# Altium PCB JHPowerSupplyPCBPart1.PcbDoc
Units mm, origin at the board's own origin, x right, y up, seen from the top; angles counter-clockwise.
Board outline 96.01 x 90 mm, 2 copper layers (Top Layer, Bottom Layer); 24 components, 16 nets, 168 pads, 79 vias.
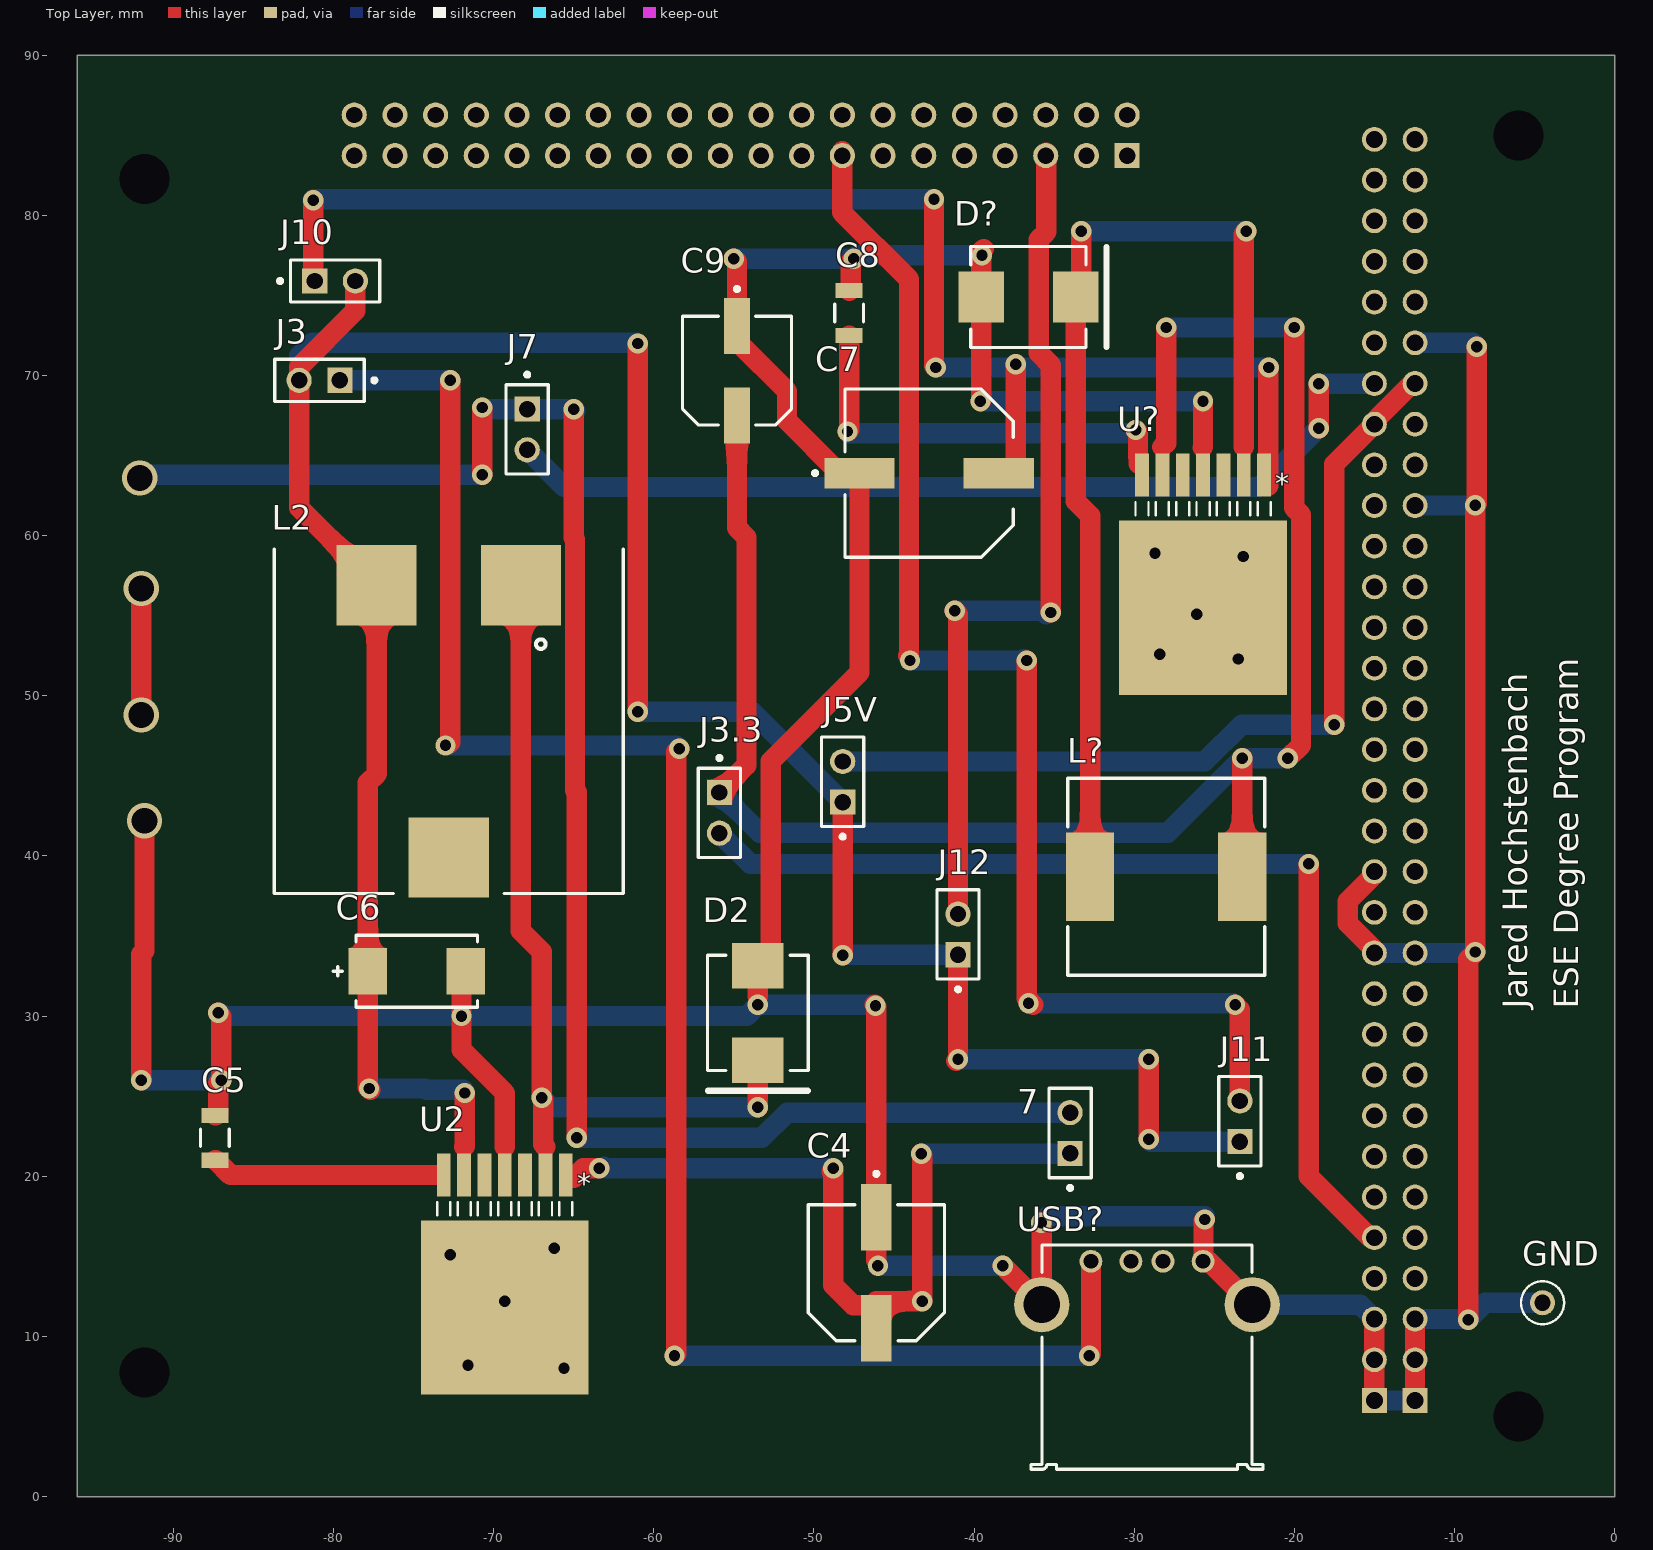
[diagram p0: Top Layer view]
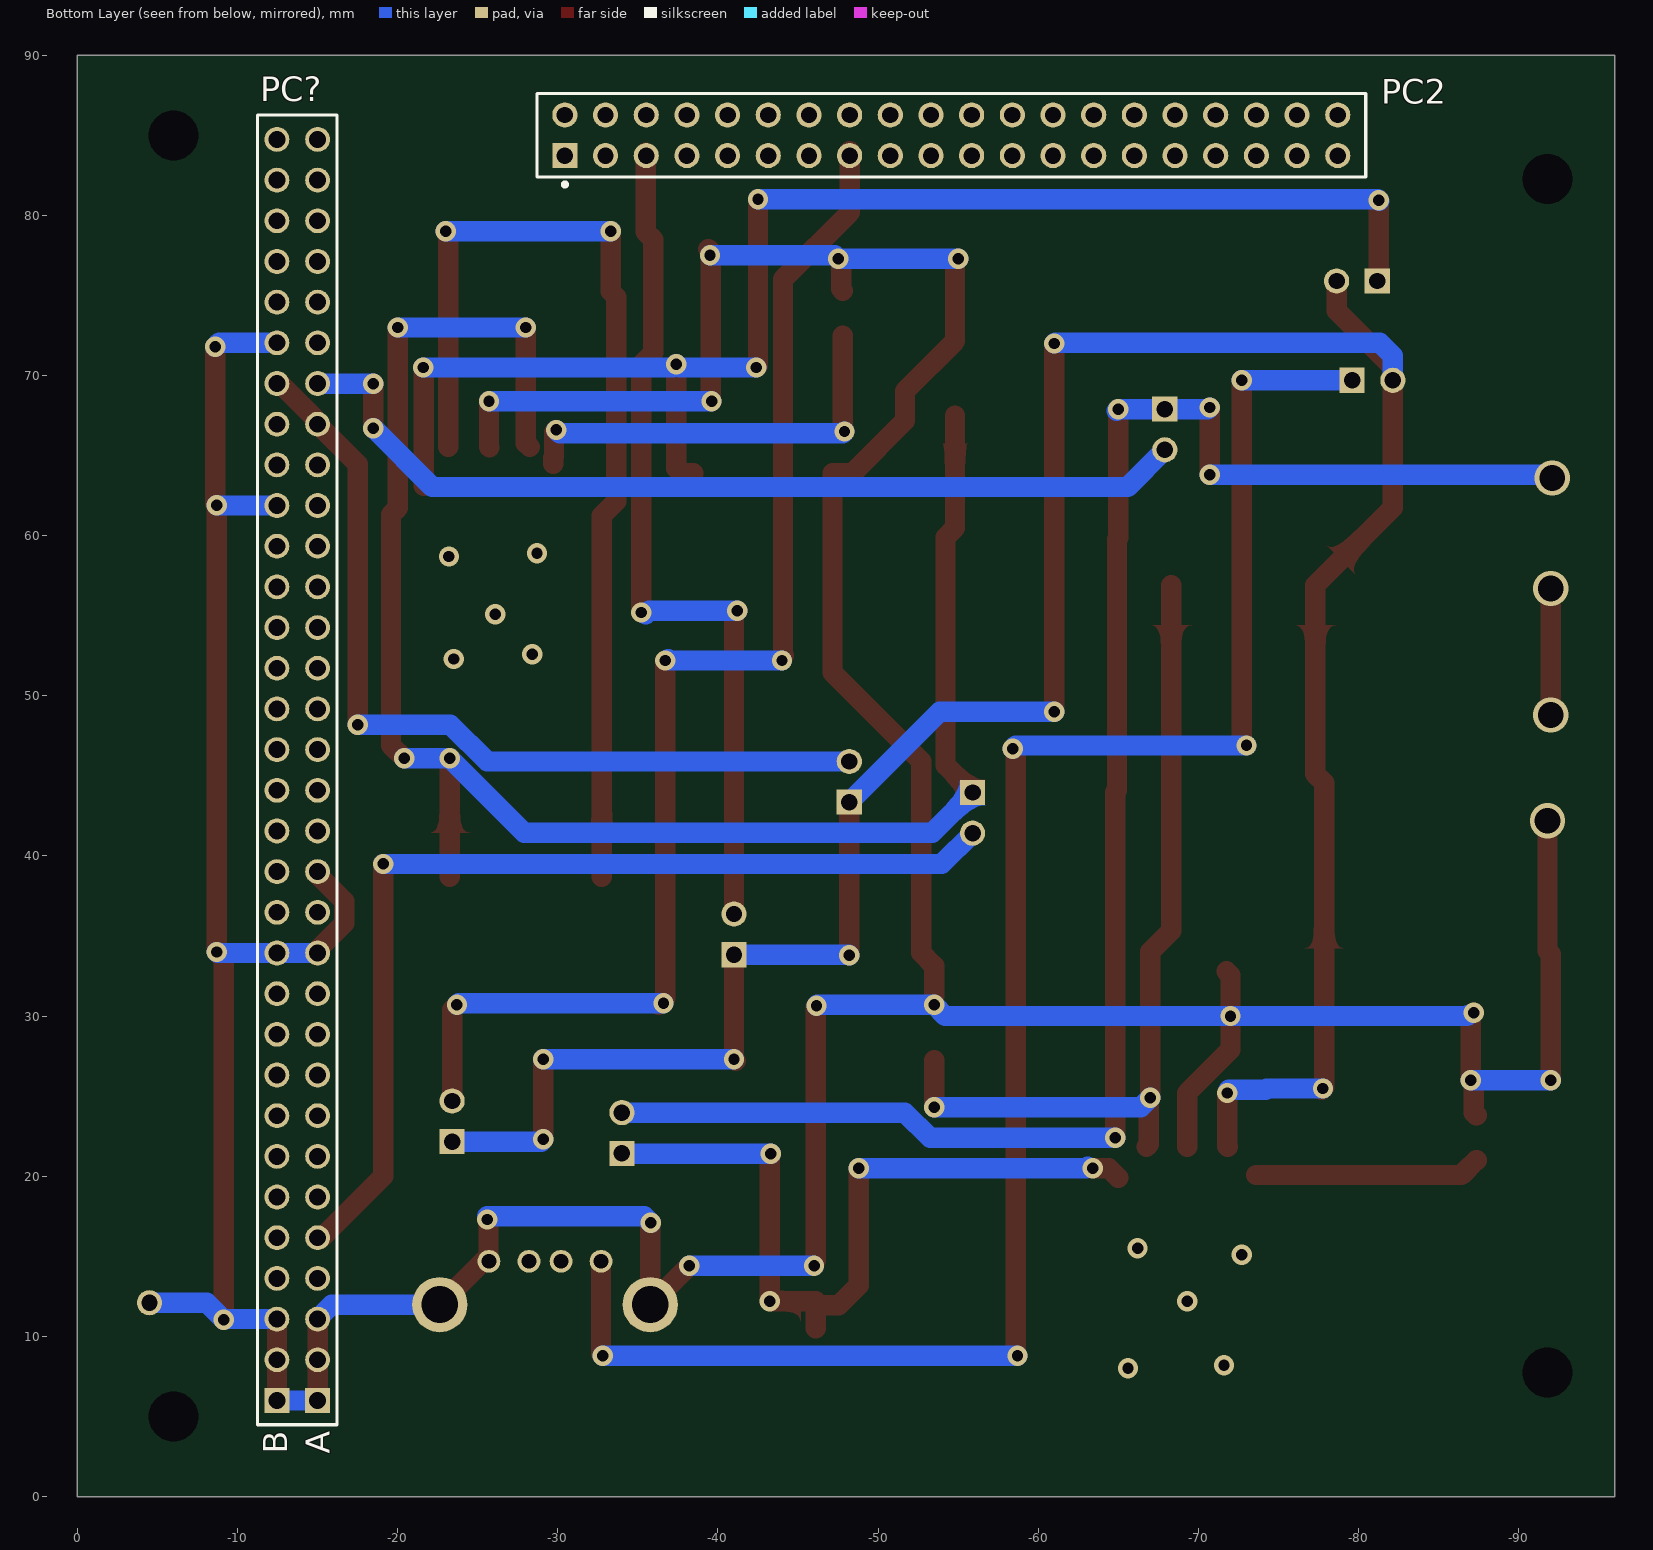
[diagram p1: Bottom Layer view, seen from below]
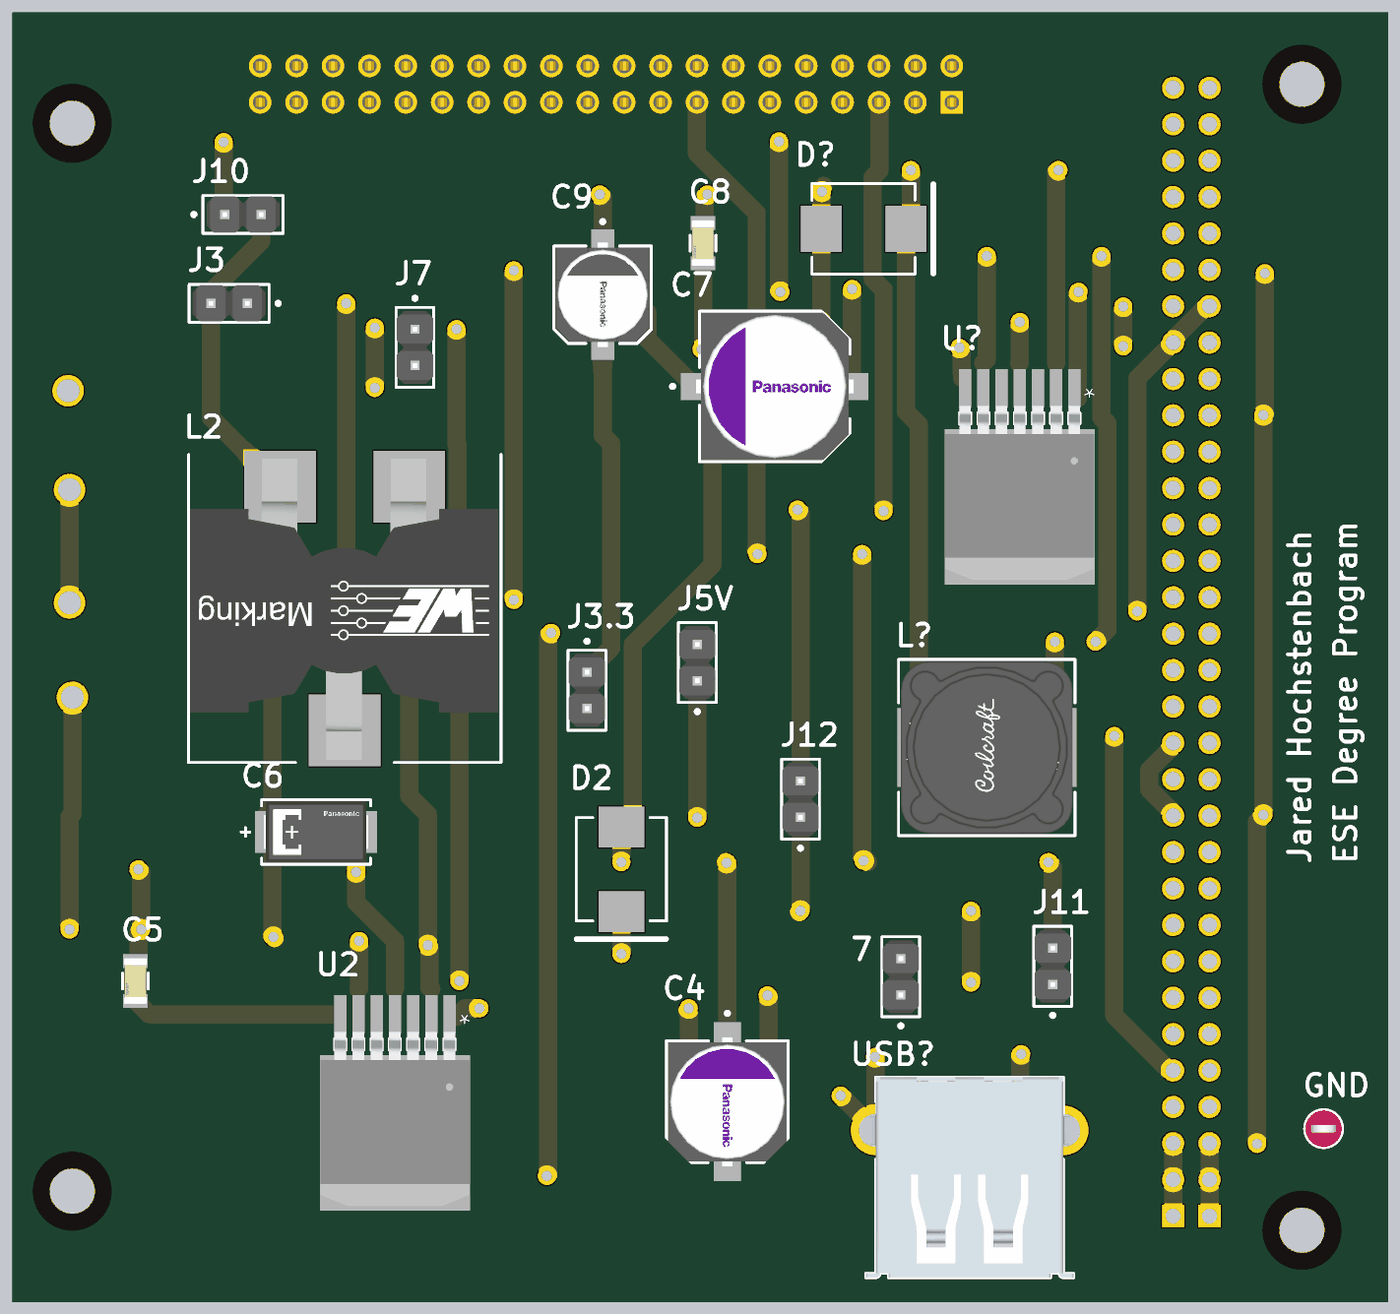
[diagram p2: 3D render of the assembled board from above, using the file's embedded part models]

## Layer stack, top to bottom
Top Solder: solder mask 0.0102, Solder Resist, Dk 3.5
Top Layer: signal copper 0.0356
Dielectric 1: dielectric 0.32, FR-4, Dk 4.8
Bottom Layer: signal copper 0.0356
Bottom Solder: solder mask 0.0102, Solder Resist, Dk 3.5

## Board outline
-96,0 0.012,0 0.012,90 -96,90

## Design rules (kind name [scope] priority, off if disabled: settings)
Clearance [All] p1: gap=0.254 ignorepadtopadclearanceinfootprint=FALSE except(0: Arc-Hole Track-Hole SMDPad-Hole THPad-Hole Via-Hole Fill-Hole Poly-Hole Region-Hole Text-Hole)
PolygonConnect [All] p1: connectstyle=Relief reliefconductorwidth=0.254 reliefentries=4 polygonreliefangle="90 Angle" airgapwidth=0.254
RoomDefinition JHPowerSupplySchematicpart1 [InComponentClass('JHPowerSupplySchematicpart1')] p1: confinementstyle=ConfineIn formatcopy=TRUE lockcomponents=FALSE outline -95.93,0 0.07,0 0.07,90.38 -95.93,90.38
RoutingVias [All] p1: holewidth=0.711 width=2 viastyle="Through Hole" minholewidth=0.711 minwidth=2 maxholewidth=0.711 maxwidth=2
SolderMaskExpansion [All] p1: expansion=0.102 istentingtop=FALSE
Width [All] p1: maxlimit=1.7 minlimit=1 preferedwidth=1.27 minimp=50.000000 maximp=50.000000 favimp=50.000000
30 further rules are at their usual default settings.

## Components (designator, comment, footprint, x,y, rotation, side; value= is the part's Value field where it differs from the comment)
7 "M20-9990246" FP-M20-9990246-MFG -34,22.7 r90 top
C4 "50SVPF18M" FP-OS-CON-SMT-E7-MFG -46.1,13.975 r270 top
C5 "C1206C821K5GACTU" FP-C1206C-EB-MFG -87.4,22.4 r90 top value="820 pF"
C6 "10TPE220MIL" FP-POSCAP-D3L-MFG -74.8,32.8 r180 top
C7 "50SVPF68M" FP-OS-CON-SMT-F12-MFG -42.8,63.9 r0 top
C8 "C1206C821K5GACTU" FP-C1206C-EB-MFG -47.8,73.9 r90 top value="820 pF"
C9 "6SVPC330M" FP-OS-CON-SMT-C6-MFG -54.8,70.3 r270 top
D2 "B560C-13-F" DIOD-B5X0C-2_M -53.5,30.2 r90 top
D? "B560C-13-F" DIOD-B5X0C-2_M -36.6,74.9 r180 top
GND "5000" FP-5000-MFG -4.5,12.1 r0 top
J3 "M20-9990246" FP-M20-9990246-MFG -80.87,69.7 r180 top
J3.3 "M20-9990246" FP-M20-9990246-MFG -55.9,42.69 r270 top
J5V "M20-9990246" FP-M20-9990246-MFG -48.2,44.63 r90 top
J7 "M20-9990246" FP-M20-9990246-MFG -67.9,66.63 r270 top
J10 "M20-9990246" FP-M20-9990246-MFG -79.9,75.9 r0 top
J11 "M20-9990246" FP-M20-9990246-MFG -23.4,23.43 r90 top
J12 "M20-9990246" FP-M20-9990246-MFG -41,35.1 r90 top
L2 "7443631000" WE-HCF-2013 -72.8,48.4 r270 top
L? "MSS1210-333MEB" FP-MSS1210-333MEB-MFG -28,38.7 r0 top
PC2 "M20-6102045" FP-M20-6102045-MFG -54.57,85 r180 bottom
PC? "PC104-CN-2P-F-R64" BTB2-54-V64F-04 -15,6 r90 bottom
U2 "LM2599SX-5.0/NOPB" TS7B -69.3,11.8 r180 top
U? "LM2599SX-3.3/NOPB" TS7B -25.7,55.5 r180 top
USB? "61400416021" 61400416021 -29.2,8.7 r0 top

## Footprints (in the part's own frame and the unit in brackets; to place one, negate y for a bottom-side part, rotate by r counter-clockwise, add the part's x,y. Pads: shape width x height; smd on the part's side, far side on the other; paste and mask are expansions set on the pad)
61400416021 [mm] "USB 2.0 Type A Horizontal"
  round 1.42 hole 0.92: 1(-3.5,5.99) 2(-1,5.99) 3(1,5.99) 4(3.5,5.99)
  round 3.45 hole 2.3: Shell(-6.57,3.28) Shell(6.57,3.28)
  silkscreen extent -7.25,-7 7.25,7, body extent -8,-7 8,7, height 7.63
BTB2-54-V64F-04 [mm] "Board-to-Board Connector, PC104 BA ISA, Stackthrough, Vertical, 2-Row, 64-Postion, Pitch 2.54mm,  Receptacle , Height 11.05mm"
  rect 1.55x1.55 hole 1.05: A1(0,0) B1(0,2.54)
  round 1.55 hole 1.05: A2(2.54,0) A3(5.08,0) A4(7.62,0) A5(10.16,0) A6(12.7,0) A7(15.24,0) A8(17.78,0) A9(20.32,0) A10(22.86,0) A11(25.4,0) A12(27.94,0) A13(30.48,0) A14(33.02,0) A15(35.56,0) A16(38.1,0) A17(40.64,0) A18(43.18,0) A19(45.72,0) A20(48.26,0) A21(50.8,0) A22(53.34,0) A23(55.88,0) A24(58.42,0) A25(60.96,0) A26(63.5,0) A27(66.04,0) A28(68.58,0) A29(71.12,0) A30(73.66,0) A31(76.2,0) A32(78.74,0) B2(2.54,2.54) B3(5.08,2.54) B4(7.62,2.54) B5(10.16,2.54) B6(12.7,2.54) B7(15.24,2.54) B8(17.78,2.54) B9(20.32,2.54) B10(22.86,2.54) B11(25.4,2.54) B12(27.94,2.54) B13(30.48,2.54) B14(33.02,2.54) B15(35.56,2.54) B16(38.1,2.54) B17(40.64,2.54) B18(43.18,2.54) B19(45.72,2.54) B20(48.26,2.54) B21(50.8,2.54) B22(53.34,2.54) B23(55.88,2.54) B24(58.42,2.54) B25(60.96,2.54) B26(63.5,2.54) B27(66.04,2.54) B28(68.58,2.54) B29(71.12,2.54) B30(73.66,2.54) B31(76.2,2.54) B32(78.74,2.54)
  silkscreen extent -1.52,-1.2 80.27,3.75, body extent -1.6,-1.2 80.34,3.75, height 11.05
DIOD-B5X0C-2_M [mm] "Molded Diode, 2-Leads, Body 7.11x6.22mm, IPC Low Density"
  rect 2.85x3.2 smd: 1(-2.95,0) 2(2.95,0)
  silkscreen extent -4.87,-3.15 3.6,3.15, body extent -3.56,-3.11 3.55,3.11, height 2.63
FP-5000-MFG [mm]
  round 1.57 hole 1.02 paste-1000 mask+0: 1(0,0)
  silkscreen extent -1.35,-1.34 1.35,1.34, body extent -1.45,-1.45 1.45,1.45, height 0.25
FP-C1206C-EB-MFG [mm]
  rect 0.95x1.7 smd paste+0 mask+0: 1(-1.4,0) 2(1.4,0)
  silkscreen extent -0.55,-0.9 0.55,0.9, body extent -2,-1 2,1, height 0.25
FP-M20-6102045-MFG [mm]
  rect 1.57x1.57 hole 1.02 paste-1000 mask+0: 1(-24.13,-1.27)
  round 1.57 hole 1.02 paste-1000 mask+0: 2(-24.13,1.27) 3(-21.59,-1.27) 4(-21.59,1.27) 5(-19.05,-1.27) 6(-19.05,1.27) 7(-16.51,-1.27) 8(-16.51,1.27) 9(-13.97,-1.27) 10(-13.97,1.27) 11(-11.43,-1.27) 12(-11.43,1.27) 13(-8.89,-1.27) 14(-8.89,1.27) 15(-6.35,-1.27) 16(-6.35,1.27) 17(-3.81,-1.27) 18(-3.81,1.27) 19(-1.27,-1.27) 20(-1.27,1.27) 21(1.27,-1.27) 22(1.27,1.27) 23(3.81,-1.27) 24(3.81,1.27) 25(6.35,-1.27) 26(6.35,1.27) 27(8.89,-1.27) 28(8.89,1.27) 29(11.43,-1.27) 30(11.43,1.27) 31(13.97,-1.27) 32(13.97,1.27) 33(16.51,-1.27) 34(16.51,1.27) 35(19.05,-1.27) 36(19.05,1.27) 37(21.59,-1.27) 38(21.59,1.27) 39(24.13,-1.27) 40(24.13,1.27)
  silkscreen extent -25.88,-3.19 25.88,2.6, body extent -25.73,-2.5 25.73,2.5, height 11.25
FP-M20-9990246-MFG [mm]
  rect 1.57x1.57 hole 1.02 paste-1000 mask+0: 1(-1.27,0)
  round 1.57 hole 1.02 paste-1000 mask+0: 2(1.27,0)
  silkscreen extent -3.55,-1.32 2.79,1.32, body extent -2.89,-1.42 2.89,1.42, height 0.25
FP-MSS1210-333MEB-MFG [mm]
  rect 3x5.5 smd paste+0 mask+0: 1(-4.75,0) 2(4.75,0)
  silkscreen extent -6.15,-6.15 6.15,6.15, body extent -6.35,-6.25 6.35,6.25, height 0.25
FP-OS-CON-SMT-C6-MFG [mm]
  rect 3.5x1.6 smd paste+0 mask+0: 1(-2.8,0) 2(2.8,0)
  silkscreen extent -5.22,-3.4 3.4,3.4, body extent -4.8,-3.65 4.8,3.65, height 0.25
FP-OS-CON-SMT-E7-MFG [mm]
  rect 4.15x1.9 smd paste+0 mask+0: 1(-3.475,0) 2(3.475,0)
  silkscreen extent -6.3,-4.25 4.25,4.25, body extent -5.8,-4.5 5.8,4.5, height 0.25
FP-OS-CON-SMT-F12-MFG [mm]
  rect 4.4x1.9 smd paste+0 mask+0: 1(-4.35,0) 2(4.35,0)
  silkscreen extent -7.25,-5.25 5.25,5.25, body extent -6.8,-5.5 6.8,5.5, height 0.25
FP-POSCAP-D3L-MFG [mm]
  rect 2.4x2.9 smd paste+0 mask+0: 1(-3.05,0) 2(3.05,0)
  silkscreen extent -3.8,-2.25 5.23,2.25, body extent -4.35,-2.35 4.35,2.35, height 0.25
TS7B [mil]
  rect 33.97x105.56 smd paste+0 mask+0: 1(-150,-326) 2(-100,-326) 3(-50,-326) 4(0,-326) 5(50,-326) 6(100,-326) 7(150,-326)
  rect 412x428 smd paste+0 mask+0: 8(0,0)
  silkscreen extent -166,-259 166,-227, body extent -205,-278 205,200, height 189
WE-HCF-2013 [mm] "SMD Inductor, 3-Leads, Body 21.5 x 21.0 mm"
  rect 5x5 smd: 1(-8.5,4.5) 2(-8.5,-4.5) 3(8.5,0)
  silkscreen extent -10.75,-10.9 10.75,10.9, body extent -10.45,-10.8 10.55,10.7, height 13.98

## Part data
7 J3 J3.3 J5V J7 J10 J11 J12: library part CMP-15831-000009-1, "CONN HEADER VERT 2POS 2.54MM", Current Rating=3A, Manufacturer=Harwin, Temperature="-40°C to +105°C", Temperature Range High=+105°C, Temperature Range Low=-40°C, Automotive=No, Category=Conn, ComponentLink2Description=Datasheet, ComponentLink2URL=https://cdn.harwin.com/pdfs/M20-999.pdf, Conn Gender=Male, Conn Orientation=Vertical, Contact Material=Tin,Nickel, Device Class L1=Connectors, Device Class L2="Headers and Wire Housings", Device Class L3=unset, Digikey Description="CONN HEADER VERT 2POS 2.54MM", Height=8.99mm, Lead Free=Yes, Manufacturer Part Number=M20-9990246, Mouser Description="2.54mm (0.1\") Pitch SIL Vertical PC Tail Pin Header, 6.1mm mating pin height, tin, 2 contacts", Number of Contacts=2, Number of Rows=1, Octopart=https://octopart.com/m20-9990246-harwin-2590635, Package=M20-9990246, Pitch=2.54mm, RoHS=TRUE
C4: library part CMP-05428-000339-1, "Conductive Polymer Aluminum Solid Capacitors (OS-CON) 18uF ±20% 50V RADIAL SMT 8x6.9mm", Capacitance=18uF, Case/Package=Radial, ESR (Equivalent Series Resistance)=35mR, Leakage Current=180uA, Max Operating Temperature=105°C, Min Operating Temperature=-55°C, Package Quantity=1000, Ripple Current=2.7A, Tolerance=20%, Voltage=50V, Diameter=8mm, Dissipation Factor=12%, Height=6.9mm, Height - Seated (Max)=0.276inch, Length=6.9mm, Life (Hours)=5000Hour, Mount="Surface Mount", Number of Pins=7, Packaging="Cut Tape", Polarity=Polar, REACH SVHC="No SVHC", Ripple Current (AC)=2.7A, RoHS Compliant=Yes, Series="OS-CON™, SVPF", Termination=SMD/SMT, Voltage Rating=50V, Voltage Rating (DC)=50V, Weight=0.021164oz
C5 C8: library part CMP-03020-020553-1, "CAP CER 820PF 50V C0G/NP0 1206", Capacitance="820 pF", Manufacturer=KEMET, Package=C1206C-EB, Temperature="-55°C to +150°C", Temperature Characteristic=C0G, Temperature Coefficient=15%, Temperature Range High=+150°C, Temperature Range Low=-55°C, Tolerance=0.1, Voltage Rating="50 V", Automotive=Yes, Automotive Grade="Grade 0", Category=Cap, ComponentLink2Description=Datasheet, ComponentLink2URL=https://content.kemet.com/datasheets/KEM_C1007_X8R_ULTRA_150C_SMD.pdf, Device Class L1="Passive Components", Device Class L2=Capacitors, Device Class L3="Ceramic Capacitors", Digikey Description="CAP CER 820PF 50V C0G/NP0 1206", Height=0.88mm, Ipc Land Pattern Name=CAPC320160X78, Lead Free=Yes, Manufacturer Part Number=C1206C821K5GACTU, Material=Ceramic, Mouser Description="Multilayer Ceramic Capacitors MLCC - SMD/SMT 50volts 820pF C0G 10%", Octopart=https://octopart.com/c1206c821k5gactu-kemet-125661, RoHS=TRUE
C6: library part CMP-05428-000285-1, "Molded Tantalum Polymer Capacitor 220uF 20% 10V life 2000Hours SMD 2917", Capacitance=220uF, Case Code (Imperial)=2917, Case Code (Metric)=7343, ESR (Equivalent Series Resistance)=18mR, Leakage Current=220uA, Max Operating Temperature=105°C, Min Operating Temperature=-55°C, Package Quantity=2500, Ripple Current=2.8A, Tolerance=20%, Voltage=10V, Case/Package=2917, Construction=Flat, Depth=4.3mm, Dissipation Factor=10%, Features="General Purpose", Height=2.8mm, Height - Seated (Max)=0.118inch, Lead Free="Lead Free", Length=7.3mm, Mount="Surface Mount", Packaging="Tape and Reel", Polarity=Polar, Radiation Hardening=No, REACH SVHC="No SVHC", RoHS Compliant=Yes, Series="POSCAP™ TPE", Termination=SMD/SMT, Voltage Rating=10V, Voltage Rating (DC)=10V, Width=0.169inch
C7: library part CMP-05428-000631-1, "Conductive Polymer Aluminum Solid Capacitors (OS-CON) 68uF ±20% 50V RADIAL SMT 10x12.6mm", Capacitance=68uF, Case/Package=Radial, ESR (Equivalent Series Resistance)=20mR, Leakage Current=680uA, Max Operating Temperature=105°C, Min Operating Temperature=-55°C, Package Quantity=400, Ripple Current=4.3A, Tolerance=20%, Voltage=50V, Construction=Cylindrical, Diameter=10mm, Dissipation Factor=12%, Height=12.6mm, Height - Seated (Max)=0.5inch, Lead Free="Lead Free", Length=12.6mm, Life (Hours)=5000Hour, Mount="Surface Mount", Number of Pins=12, Packaging="Tape and Reel", Polarity=Polar, REACH SVHC="No SVHC", Ripple Current (AC)=4.3A, RoHS Compliant=Yes, Series="OS-CON™, SVPF", Termination=SMD/SMT, Voltage Rating=50V, Voltage Rating (DC)=50V
C9: library part CMP-05428-000913-1, "Conductive Polymer Aluminum Solid Capacitors (OS-CON) 330uF ±20% 6.3V", Capacitance=330uF, Case/Package=Radial, ESR (Equivalent Series Resistance)=17mR, Leakage Current=415uA, Max Operating Temperature=105°C, Min Operating Temperature=-55°C, Package Quantity=1000, Ripple Current=3.39A, Tolerance=20%, Voltage=6.3V, Construction=Cylindrical, Diameter=6.3mm, Dissipation Factor=12%, Height=5.9mm, Height - Seated (Max)=0.236inch, Lead Free="Lead Free", Length=5.9mm, Life (Hours)=2000Hour, Mount="Surface Mount", Number of Pins=6, Packaging="Tape and Reel", Polarity=Polar, Radiation Hardening=No, REACH SVHC="No SVHC", Ripple Current (AC)=3.39A, RoHS Compliant=Yes, Series="OS-CON™, SVPC", Termination=SMD/SMT, Voltage Rating=6.3V, Voltage Rating (DC)=6.3V
D2 D?: library part CMP-2000-05098-2, "Schottky Barrier Rectifier, 5 A, 60 V, -55 to 125 degC, 2-Pin SMD, RoHS, Tape and Reel", If - Forward Current=5A, Ifsm - Forward Surge Current=100A, Ir - Reverse Current=500uA, Manufacturer=DiodesIncorporated, Maximum Operating Temperature=+125C, Minimum Operating Temperature=-55C, Operating Temperature Range=-55Cto+125C, Package / Case=SMC, Vf - Forward Voltage=0.7V, Vrrm - Repetitive Reverse Voltage=60V, Brand=DiodesIncorporated, Configuration=Single, Datasheet URL=https://datasheet.ciiva.com/27052/1538961-27052355.pdf, Datasheet Version="Rev. 7-2, 06/2007", Factory Pack Quantity=3000, Height=2.5mm, Length=7.11mm, Manufacturer URL=http://www.diodes.com/, Mounting Style=SMD/SMT, Packaging=Reel, Product=SchottkyDiodes, Product Category=SchottkyDiodes&Rectifiers, RoHS=True, Series=B560, Technology=Si, Termination Style=SMD/SMT, Type=SchottkyBarrierRectifier, Unit Weight=0.007408oz, Width=6.22mm
GND: library part CMP-19636-000027-1, "PC TEST POINT MINIATURE RED", Color=Red, Flammability Rating="UL94 V-0", Package Quantity=100, Body Material=Bronze, Contact Material=Bronze, Contact Plating=Tin, Height=0.3inch, Hole Diameter=1.6mm, Housing Color=Red, Inside Diameter=1.27mm, Insulation=Insulated, Lead Free="Lead Free", Length=7.62mm, Material=Nylon, Mount=PCB, Number of Contacts=1, Number of Ports=1, Orientation=Straight, Outside Diameter=2.54mm, Packaging=Bulk, Plating=Silver, REACH SVHC="No SVHC", RoHS Compliant=Yes, Series=THM
L2: library part CMP-0226-00157-1, "SMD High Current Inductor WE-HCF, L=10.0 µH", Inductance="10.0 ÂµH", ComponentLink1Description="Manufacturer Link", ComponentLink1URL=http://www.we-online.com, ComponentLink2Description=Datasheet, ComponentLink2URL=http://www.we-online.de/katalog/media/pdf/7443631000.pdf, DatasheetVersion="ver 1, Jul-2009", PackageDescription="SMD Inductor, 3-Leads, Body 21.5 x 21.0 mm", PackageReference=WE-HCF-2013, PackageVersion=2009
L?: library part CMP-11268-000051-1, "Fixed Inductor MSS1210 AEC-Q200 33 uH 20 % 5.9 A", DC Resistance (DCR)=39mR, Inductance=33uH, Inductance Tolerance=20%, Max DC Current=5.9A, Max Operating Temperature=85°C, Min Operating Temperature=-40°C, Package Quantity=25, Saturation Current=5.4A, Self Resonant Frequency=7.5MHz, Test Frequency=100kHz, Core Material=Ferrite, Height=10.2mm, Lead Free="Contains Lead", Length=12.3mm, Mount="Surface Mount", Packaging="Tape and Reel", REACH SVHC="No SVHC", RMS Current (Irms)=5.9A, Shielding=Shielded, Termination=SMD/SMT, Tolerance=20%, Width=12.3mm
PC2: library part CMP-15831-000080-1, "CONN STKTHRU PC/104 40POS PCB", Color=Black, Contact Resistance=30mR, Current Rating=3A, Flammability Rating="UL94 V-0", Insulation Resistance=5GR, Max Operating Temperature=105°C, Min Operating Temperature=-55°C, Package Quantity=11, Contact Material=Bronze, Contact Plating=Gold, Depth=5.25mm, Gender=Receptacle, Housing Color=Black, Housing Material=Nylon, Length=51.46mm, Material=Nylon, Max Current Rating=3A, Mount="Through Hole", Number of Contacts=40, Number of Positions=40, Number of Rows=2, Orientation=Straight, Packaging=Rail/Tube, Pitch=2.54mm, Radiation Hardening=No, REACH SVHC="No SVHC", Series=M20, Termination=Solder, Weight=0.218205oz
PC?: library part CMP-0001-00110-1, "Board-to-Board Connector, PC104 BA ISA, Stackthrough, Vertical, 2-Row, 64-Postion, Pitch 2.54mm,  Receptacle, Height 11.05mm", Package Reference=BTB2-54-V64F-04, ClassName="Board Template Connector", Mating Connector="Harwin-M20-6103205 (stackthrough)", Publisher=Altium
U2 U?: "No Description Available", Mfr_Name="Texas Instruments", Copyright="Copyright (C) 2023 Ultra Librarian. All rights reserved.", RefDes=RefDes, Type=DEV
  U2: Manufacturer_Part_Number=LM2599SX-5.0/NOPB
  U?: Manufacturer_Part_Number=LM2599SX-3.3/NOPB
USB?: library part CMP-1502-03227-1, "USB 2.0 Type A Receptacle WR-COM, Horizontal, THT", Contact Resistance=20mOhm, Manufacturer="Wurth Elektronik", Operating Temperature=-40to105degC, Rated Current=1.5A, Working Voltage=30VAC, Connector Type=USB2.0TypeA, Datasheet URL=https://katalog.we-online.de/em/datasheet/61400416021.pdf, Gender=Receptacle, Manufacturer URL=http://www.we-online.de, Mounting Technology=THT, Orientation=Horizontal, Package Reference=61400416021, Packaging=Tray, Part Number=61400416021, Publisher=WurthElektronik

## Free pads (board coordinates)
  round 1.524 hole 3.12 mask+2: 2(-91.81,7.735) 3(-6.01,5.01) 4(-91.81,82.265) 5(-6.01,84.99)

## Via types
v1: diameter 1.27, hole 0.711, Top Layer to Bottom Layer, 75 vias
v2: diameter 2.2, hole 1.6, Top Layer to Bottom Layer, 4 vias

## Nets (pads, with @x,y where several pads share a name; then routed paths per layer and width w, separated by ;. In a path a pad name is that pad's centre, name@x,y a point inside that pad or via, vN(x,y) a via of type N, cw(c..) or ccw(c..) an arc to the next point about the centre after c; other vN are vias at no path point)
3.3V: J3.3.2 PC?.A5 | length 62.8
  Top Layer w1.27: v1(-19.1,39.5) -19.1,20 -15.314,16.214 -15.054,16.214 PC?.A5
  Bottom Layer w1.27: J3.3.2 -53.98,39.5 v1(-19.1,39.5)
5IC: J5V.2 PC?.A25 PC?.B26 | length 55.1
  Top Layer w1.27: v1(-17.5,48.2) -17.5,64.46 PC?.A25 -15,67.036 -14.86,67.176 -14.86,67.287 -12.7,69.446 -12.514,69.446 PC?.B26
  Bottom Layer w1.27: J5V.2 -25.596,45.9 -23.296,48.2 v1(-17.5,48.2)
BAT: J7.2 PC?.A26 | length 58.2
  Top Layer w1.27: v1(-18.476,66.7) v1(-18.476,69.476)
  Bottom Layer w1.27: J7.2 -65.577,63.037 -22.163,63.037 -18.5,66.7 v1(-18.476,66.7) ; v1(-18.476,69.476) -15.024,69.476 PC?.A26
E5V: J11.2 PC2.15 | length 81.1
  Top Layer w1.27: PC2.15@-48.22,84 -48.22,80.175 -44.061,76.016 -44.061,52.539 v1@-44.1,52.5 ; v1(-36.7,52.2) -36.7,31.1 v1@-36.3,30.7 ; v1(-23.7,30.7) -23.4,30.4 J11.2
  Bottom Layer w1.27: v1(-44,52.2) -37,52.2 v1@-36.9,52.3 ; v1(-36.6,30.8) -23.8,30.8 v1(-23.7,30.7)
GND: C4.1 C5.2 C6.1 C7.1 C8.2 C9.1 D2.2 D?.2 GND.1 PC?.A1 PC?.A2 PC?.A3 PC?.A12 PC?.A14 PC?.B1 PC?.B2 PC?.B3 PC?.B12 PC?.B23 PC?.B27 U2.4 U?.4 USB?.4 USB?.Shell | length 336.3
  Top Layer w1.27: v1(-92,26) -92,33.874 -91.8,34.074 v2(-91.8,42.2) ; C5.2 -87.345,23.8 -87.185,23.96 -87.185,25.815 v1(-87,26) -87,30 v1(-87.2,30.2) ; C6.1 -72,32.55 v1(-72,30) -72,27.9 -69.3,25.2 -69.3,21.84 ; v1(-55,77.3) -54.8,77.1 C9.1 -54.8,72.15 -51.675,69.025 -51.675,67.175 -48.4,63.9 C7.1 -47.15,51.455 -52.685,45.92 -52.685,33.94 -53.475,33.15 D2.2 v1@-53.5,31.228 ; C8.2 -47.7,75.4 v1@-47.7,77.1 ; v1@-46.2,30.7 -46.1,30.6 C4.1 v1@-46.1,14.743 ; v1(-39.6,68.4) -39.55,68.45 D?.2 -39.55,77.75 v1@-39.4,77.9 ; v1(-38.2,14.4) -35.78,11.98 -35.77,11.98 -35.77,17.07 v1(-35.8,17.1) ; -25.736,65.504 -25.7,65.54 v1(-25.7,68.4) ; v1(-25.6,17.3) -25.671,17.229 -25.671,14.719 USB?.4 -25.671,14.661 -25.311,14.661 USB?.Shell@-22.63,11.98 ; PC?.A1 PC?.A3 ; PC?.A12 -15.054,33.994 -15.054,34.18 -16.664,35.791 -16.664,37.169 -15.14,38.693 -15.14,38.804 -14.924,39.02 PC?.A14@-14.871,39.02 ; PC?.B1 PC?.B3 ; PC?.B12@-12.46,33.964 PC?.B12@-12.46,34.04 ; v1(-9.14,11.04) -9.14,33.56 v1(-8.7,34) v1(-8.7,61.9) -8.6,62 v1(-8.6,71.8)
  Bottom Layer w1.27: v1(-92,26) v1(-87,26) ; v1@-86.9,30.1 -86.8,30 v1(-72,30) -54.2,30 v1(-53.5,30.7) -46.2,30.7 v1(-46.15,30.65) ; v1(-55,77.3) v1(-47.5,77.3) -47.3,77.5 v1(-39.5,77.5) ; v1(-46,14.4) v1(-38.2,14.4) ; v1(-39.6,68.4) v1(-25.7,68.4) ; v1(-35.8,17.1) -35.4,17.5 v1@-25.6,17.5 ; USB?.Shell@-22.63,11.98 -15.884,11.98 -15,11.096 PC?.A3 ; PC?.A1 PC?.B1 ; PC?.A12@-14.4,33.94 -8.76,33.94 v1(-8.7,34) ; PC?.B23 -8.72,61.88 v1(-8.7,61.9) ; PC?.B3@-11.86,11.08 -9.18,11.08 v1(-9.14,11.04) -8.08,12.1 GND.1 ; PC?.B27@-11.86,72.04 -8.84,72.04 v1(-8.6,71.8)
MOT: J12.2 PC2.5 | length 54
  Top Layer w1.27: v1(-41.2,55.3) -41,55.1 J12.2 ; PC2.5@-35.5,83.912 -35.5,78.955 -35.964,78.491 -35.964,71.419 -35.2,70.655 v1(-35.2,55.2)
  Bottom Layer w1.27: v1(-41.2,55.3) -35.7,55.3 v1@-35.5,55.1
Net7_1: 7.1 C4.2 U2.1 | length 49.2
  Top Layer w1.27: -65,19.9 -64.4,20.5 v1(-63.4,20.5) ; v1@-48.9,20.3 -48.8,20.2 -48.8,13.2 -47.54,11.94 -46.415,11.94 -46.1,11.625 C4.2 ; C4.2@-46.1,12.203 v1(-43.227,12.203) -43.227,21.327 v1(-43.3,21.4)
  Bottom Layer w1.27: v1@-63.1,20.6 -63,20.5 v1(-48.8,20.5) ; v1(-43.3,21.4) -34.03,21.4 7.1
Net7_2: 7.2 J7.1 | length 108.3
  Top Layer w1.27: v1(-70.7,63.8) v1(-70.7,68) ; v1(-65,67.9) -65,65 -65,59.857 -64.911,59.768 -64.911,44.089 -64.8,43.978 v1(-64.8,22.4)
  Bottom Layer w1.27: v2@-91.8,63.6 -91.6,63.8 v1(-70.7,63.8) ; v1(-70.7,68) -70.6,67.9 J7.1 v1(-65,67.9) v1@-64.9,67.8 ; v1(-64.8,22.4) -53.245,22.4 -51.675,23.97 7.2
  other v2: -92.1,63.6
NetC5_1: C5.1 U2.7 | length 14.2
  Top Layer w1.27: C5.1 -87.345,21 -86.425,20.08 -73.6,20.08
NetC6_2: C6.2 J3.2 J5V.1 J10.2 J11.1 J12.1 L2.2 U2.6 | length 170.8
  Top Layer w1.27: J10.2 -78.63,74.04 -82.14,70.53 J3.2 -82.14,61.74 L2.2 -77.3,45.113 -77.85,44.563 C6.2 -77.85,25.55 v1(-77.775,25.475) v1@-77.7,25.4 ; -71.84,21.84 -71.8,21.88 v1(-71.8,25.2) ; v1(-61,49) v1(-61,72) ; v1(-48.2,33.8) J5V.1 ; v1@-41.1,27.2 v1(-41,27.3) J12.1 ; v1(-29.1,22.3) v1(-29.1,27.3)
  Bottom Layer w1.27: J3.2 -82.14,71.241 -81.336,72.045 -61.045,72.045 v1(-61,72) ; v1(-77.775,25.475) -74.275,25.475 -74.2,25.4 v1@-71.9,25.4 ; v1(-61,49) -53.84,49 J5V.1 ; v1(-48.2,33.8) -48.17,33.83 J12.1 ; v1(-41,27.3) v1(-29.1,27.3) ; v1(-29.1,22.3) -28.96,22.16 J11.1
NetC7_2: C7.2 J10.1 U?.1 | length 90.5
  Top Layer w1.27: v1(-81.25,80.95) -81.25,75.98 J10.1 ; v1(-42.5,81) -42.5,70.6 v1(-42.4,70.5) ; C7.2 -37.715,63.9 -37.4,64.215 v1(-37.4,70.7) ; U?.1@-21.636,63.1 -21.636,70.464 v1(-21.6,70.5)
  Bottom Layer w1.27: v1@-81.3,80.9 v1(-81.25,80.95) -81.2,81 v1(-42.5,81) ; v1(-42.4,70.5) -37.6,70.5 v1(-37.4,70.7) -37.2,70.5 v1(-21.6,70.5)
NetC8_1: C8.1 U?.7 | length 26.4
  Top Layer w1.27: v1(-47.9,66.5) -47.8,66.6 C8.1 ; v1(-29.9,66.6) -29.764,66.464 -29.764,64.908 -29.714,64.858 U?.7@-29.714,64.486
  Bottom Layer w1.27: v1(-47.9,66.5) -47.8,66.4 -30.1,66.4 v1(-29.9,66.6)
NetC9_2: C9.2 J3.3.1 L?.2 U?.6 | length 113.3
  Top Layer w1.27: J3.3.1 -54.209,45.651 -54.209,59.902 -54.8,60.493 C9.2 ; -28.24,65.54 -28,65.78 v1(-28,73) ; L?.2 v1(-23.25,46.09) ; v1(-20.41,46.09) -19.579,46.921 -19.579,61.304 -20,61.725 v1(-20,73)
  Bottom Layer w1.27: J3.3.1 -53.378,41.438 -27.902,41.438 v1(-23.25,46.09) v1(-20.41,46.09) ; v1(-28,73) v1(-20,73)
NetD2_1: D2.1 L2.1 U2.2 | length 52.2
  Top Layer w1.27: L2.1 -68.3,35.326 -67,34.026 v1(-67,24.9) ; v1@-66.9,24.767 -66.9,21.98 -66.76,21.84 ; v1(-53.5,24.3) D2.1
  Bottom Layer w1.27: v1(-67,24.9) -66.4,24.3 v1(-53.5,24.3)
NetD?_1: D?.1 L?.1 U?.2 | length 64.6
  Top Layer w1.27: v1(-33.3,79) -33.3,75.25 D?.1 -33.65,62.15 -32.75,61.25 L?.1 ; -23.16,65.54 -23.16,78.84 v1(-23,79)
  Bottom Layer w1.27: v1(-33.3,79) v1(-23,79)
NetJ3_1: J3.1 USB?.1 | length 114.2
  Top Layer w1.27: v1@-72.8,47 -72.7,47.1 v1(-72.7,69.7) ; v1(-58.7,8.8) -58.6,8.9 -58.6,46.5 v1(-58.4,46.7) ; v1(-32.8,8.8) -32.7,8.9 USB?.1
  Bottom Layer w1.27: J3.1 v1(-72.7,69.7) ; v1(-73,46.9) -58.6,46.9 v1(-58.4,46.7) ; v1(-58.7,8.8) v1(-32.8,8.8)
pads on no net: L2.3 PC2.1 PC2.2 PC2.3 PC2.4 PC2.6 PC2.7 PC2.8 PC2.9 PC2.10 PC2.11 PC2.12 PC2.13 PC2.14 PC2.16 PC2.17 PC2.18 PC2.19 PC2.20 PC2.21 PC2.22 PC2.23 PC2.24 PC2.25 PC2.26 PC2.27 PC2.28 PC2.29 PC2.30 PC2.31 PC2.32 PC2.33 PC2.34 PC2.35 PC2.36 PC2.37 PC2.38 PC2.39 PC2.40 PC?.A4 PC?.A6 PC?.A7 PC?.A8 PC?.A9 PC?.A10 PC?.A11 PC?.A13 PC?.A15 PC?.A16 PC?.A17 PC?.A18 PC?.A19 PC?.A20 PC?.A21 PC?.A22 PC?.A23 PC?.A24 PC?.A27 PC?.A28 PC?.A29 PC?.A30 PC?.A31 PC?.A32 PC?.B4 PC?.B5 PC?.B6 PC?.B7 PC?.B8 PC?.B9 PC?.B10 PC?.B11 PC?.B13 PC?.B14 PC?.B15 PC?.B16 PC?.B17 PC?.B18 PC?.B19 PC?.B20 PC?.B21 PC?.B22 PC?.B24 PC?.B25 PC?.B28 PC?.B29 PC?.B30 PC?.B31 PC?.B32 U2.3 U2.5 U2.8 U?.3 U?.5 U?.8 USB?.2 USB?.3
copper on no net: | length 8
  Top Layer w1.27: v2(-92,56.7) v2(-92,48.8) v2@-91.9,48.7
  other v1: -65.6,8 -71.6,8.2 -69.3,12.2 -72.7,15.1 -66.2,15.5 -23.5,52.3 -28.4,52.6 -26.1,55.1 -23.2,58.7 -28.7,58.9

## Silkscreen, mask and mechanical layers (free items; w line width, h text height)
Top Overlay:
  text "Jared Hochstenbach" at -5.454,30.454 h1.52 r90
  text "ESE Degree Program" at -2.262,30.454 h1.52 r90

## Text inside footprints (layer, text, board x,y; h text height)
PC?: Bottom Overlay "B" at -13.118,2.668 h1.5 r270; Bottom Overlay "A" at -15.753,2.668 h1.5 r270
U2: Top 3D Body "*" at -65.172,17.261 h1.27 r180; Top Overlay "*" at -63.902,20.715 h1.27 r180
U?: Top 3D Body "*" at -21.573,60.961 h1.27 r180; Top Overlay "*" at -20.303,64.415 h1.27 r180
USB?: Mechanical 2 "PCB Edge" at -31.4,0.48 h0.81